# Altium PCB FET-module.PcbDoc
Units mm, origin at the board's own origin, x right, y up, seen from the top; angles counter-clockwise.
Board outline 152.4 x 101.6 mm, 2 copper layers (Top Layer, Bottom Layer); 5 components, 8 nets, 26 pads, 0 vias.
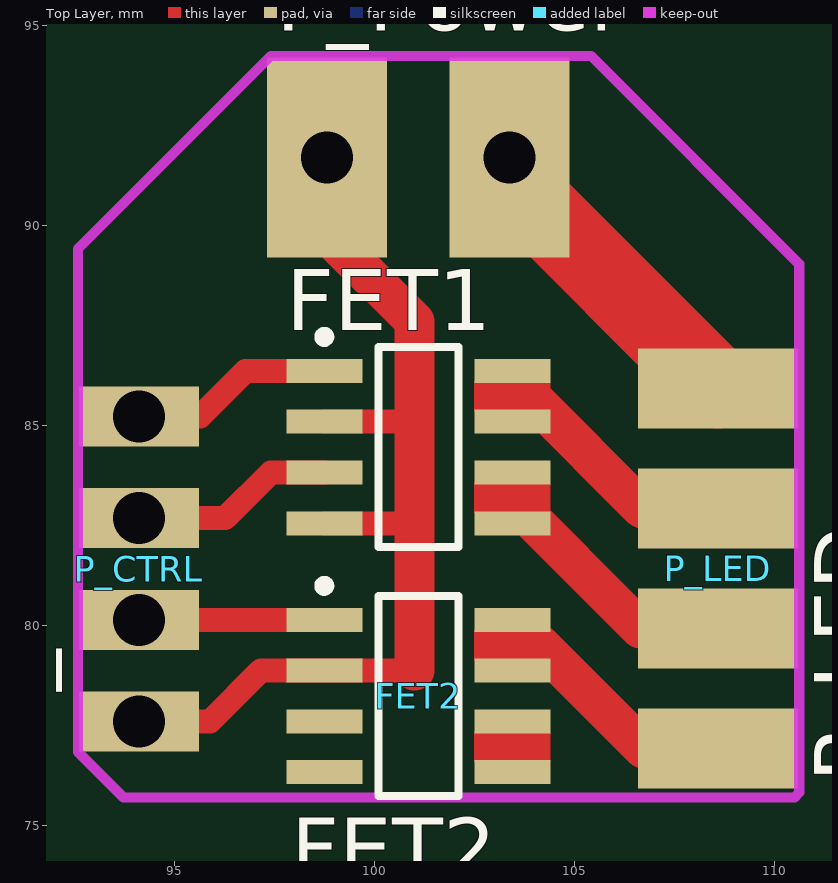
[diagram p0: Top Layer view]
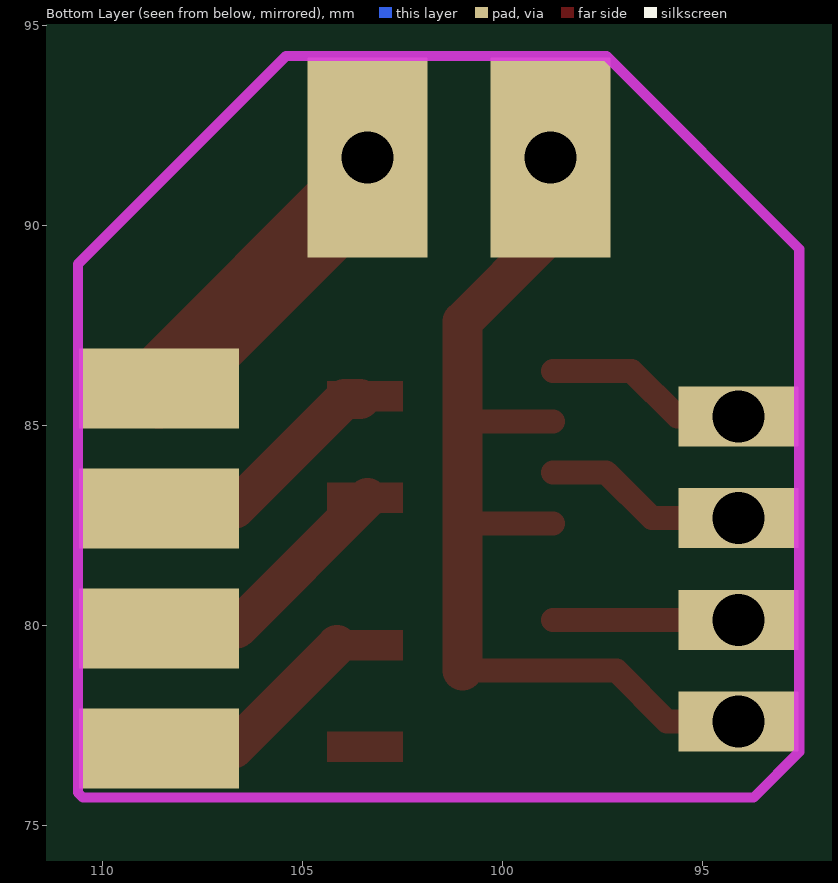
[diagram p1: Bottom Layer view, seen from below]

## Layer stack, top to bottom
Top Solder: solder mask 0.0102, Solder Resist, Dk 3.5
Top Layer: signal copper 0.0356
Dielectric 1: dielectric 0.32, FR-4, Dk 4.8
Bottom Layer: signal copper 0.0356
Bottom Solder: solder mask 0.0102, Solder Resist, Dk 3.5

## Board outline
25.4,25.4 177.8,25.4 177.8,127 25.4,127

## Design rules (kind name [scope] priority, off if disabled: settings)
Clearance [All] p1: gap=0.254
PolygonConnect [All] p1: connectstyle=Relief reliefconductorwidth=0.254 reliefentries=4 polygonreliefangle="90 Angle" airgapwidth=0.254
RoutingVias [All] p1: holewidth=0.711 width=1.27 viastyle="Through Hole" minholewidth=0.711 minwidth=1.27 maxholewidth=0.711 maxwidth=1.27
SolderMaskExpansion [All] p1: expansion=0.102
Width [All] p1: maxlimit=0.254 minlimit=0.254 preferedwidth=0.254
30 further rules are at their usual default settings.

## Components (designator, comment, footprint, x,y, rotation, side; value= is the part's Value field where it differs from the comment)
FET1 "IRF7301" SOIC8 101.092,84.455 r0 top
FET2 "IRF7301" SOIC8 101.092,78.232 r0 top
P_CTRL "Controller" "Controller connector" 94.107,82.677 r0 top
P_LED "RGB LED strip" "LED STRIP RGB CONNECTOR" 108.585,81.915 r270 top
P_Power "Power supply" "DC CONNECTOR" 101.092,91.694 r180 top

## Footprints (in the part's own frame and the unit in brackets; to place one, negate y for a bottom-side part, rotate by r counter-clockwise, add the part's x,y. Pads: shape width x height; smd on the part's side, far side on the other; paste and mask are expansions set on the pad)
"Controller connector" [mm]
  rect 3x1.5 hole 1.3: 1(0,2.54) 2(0,0) 3(0,-2.54) 4(0,-5.08)
"DC CONNECTOR" [mm]
  rect 3x5 hole 1.3: 1(-2.286,0) 2(2.286,0)
"LED STRIP RGB CONNECTOR" [mm]
  rect 2x4 all layers, no hole: 1(-4,0) 2(-1,0) 3(2,0) 4(5,0)
SOIC8 [mm] "SOIC, 8-Leads, Body 4.9x3.9mm, Pitch 1.27mm, IPC High Density"
  rect 1.9x0.6 smd: 1(-2.35,1.905) 2(-2.35,0.635) 3(-2.35,-0.635) 4(-2.35,-1.905) 5(2.35,-1.905) 6(2.35,-0.635) 7(2.35,0.635) 8(2.35,1.905)
  silkscreen extent -2.47,-2.5 1,2.88, body extent -3,-2.45 3,2.45, height 1.75

## Nets (pads, with @x,y where several pads share a name; then routed paths per layer and width w, separated by ;. In a path a pad name is that pad's centre, name@x,y a point inside that pad or via, vN(x,y) a via of type N, cw(c..) or ccw(c..) an arc to the next point about the centre after c; other vN are vias at no path point)
GND: FET1.2 FET1.4 FET2.2 P_CTRL.4 P_Power.2 | length 25.6
  Top Layer w0.254: P_Power.2@98.806,89.789 P_Power.2
  Top Layer w0.6: P_CTRL.4 95.885,77.597 97.155,78.867 FET2.2 101,78.867 ; FET1.4 100.965,82.55 ; FET1.2 100.965,85.09
  Top Layer w1: P_Power.2@98.806,89.789 101,87.595 101,78.867
NetFET1_1: FET1.1 P_CTRL.1 | length 5.1
  Top Layer w0.6: P_CTRL.1 95.631,85.217 96.774,86.36 FET1.1
NetFET1_3: FET1.3 P_CTRL.2 | length 5.1
  Top Layer w0.6: P_CTRL.2 96.266,82.677 97.409,83.82 FET1.3
NetFET1_5: FET1.5 FET1.6 P_LED.3 | length 6.6
  Top Layer w0.254: P_LED.3@106.648,79.915 P_LED.3
  Top Layer w1: 103.378,83.185 P_LED.3@106.648,79.915
NetFET1_7: FET1.7 FET1.8 P_LED.2 | length 6.2
  Top Layer w0.254: P_LED.2@106.696,82.915 P_LED.2
  Top Layer w1: 103.569,85.661 103.95,85.661 P_LED.2@106.696,82.915
NetFET2_1: FET2.1 P_CTRL.3 | length 4.6
  Top Layer w0.6: P_CTRL.3 FET2.1
NetFET2_7: FET2.7 FET2.8 P_LED.4 | length 5.5
  Top Layer w0.254: P_LED.4@106.727,76.915 P_LED.4
  Top Layer w1: 104.14,79.502 P_LED.4@106.727,76.915
VCC: P_LED.1 P_Power.1 | length 7.9
  Top Layer w0.254: P_Power.1@103.378,91.122 P_Power.1
  Top Layer w2: P_Power.1@103.378,91.122 P_LED.1
pads on no net: FET2.3 FET2.4 FET2.5 FET2.6

## Keep-outs
Keep-Out Layer:
  lines w0.254: 92.583,76.835 92.583,89.408 97.409,94.234 105.41,94.234 110.617,89.027 110.617,75.819 110.49,75.692 93.726,75.692 92.583,76.835

## Other copper
Top Layer:
  rectangle: 102.489,76.581 104.394,77.343
  rectangle net NetFET2_7: 102.489,79.121 104.394,79.883
  rectangle net NetFET1_5: 102.489,82.804 104.394,83.566
  rectangle net NetFET1_7: 102.489,85.344 104.394,86.106